# Altium PCB NEW_PCB_2021-12-28.pcbdoc
Units mm, origin at the board's own origin, x right, y up, seen from the top; angles counter-clockwise.
Board outline 29.65 x 29.79 mm, 2 copper layers (Top Layer, Bottom Layer); 1 components, 0 nets, 6 pads, 0 vias.
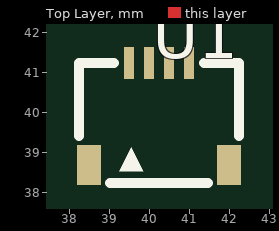
[diagram p0: Top Layer view]
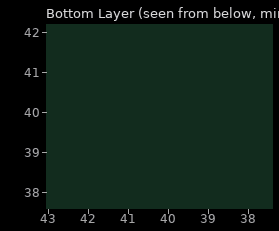
[diagram p1: Bottom Layer view, seen from below]

## Layer stack, top to bottom
Top Layer: signal copper (thickness not stored)
Dielectric: dielectric 0.32, FR-4, Dk 4.8
Bottom Layer: signal copper (thickness not stored)

## Board outline
55.054,25.4 25.4,25.4 25.4,55.191 55.054,55.191

## Components (designator, comment, footprint, x,y, rotation, side; value= is the part's Value field where it differs from the comment)
U1 "FFC-SMD_4P-P0.50_AFC42-S04FMA-1H" FFC-SMD_4P-P0.50_AFC42-S04FMA-1H 40.227,39.952 r0 top

## Footprints (in the part's own frame and the unit in brackets; to place one, negate y for a bottom-side part, rotate by r counter-clockwise, add the part's x,y. Pads: shape width x height; smd on the part's side, far side on the other; paste and mask are expansions set on the pad)
FFC-SMD_4P-P0.50_AFC42-S04FMA-1H [mm]
  rect 0.25x0.8 smd: 1(-0.75,1.275) 2(-0.25,1.275) 3(0.25,1.275) 4(0.75,1.275)
  rect 0.6x1 smd: 5(1.75,-1.275) 6(-1.75,-1.275)
  silkscreen extent -2,-1.72 2,1.28

## Nets (pads, with @x,y where several pads share a name; then routed paths per layer and width w, separated by ;. In a path a pad name is that pad's centre, name@x,y a point inside that pad or via, vN(x,y) a via of type N, cw(c..) or ccw(c..) an arc to the next point about the centre after c; other vN are vias at no path point)
pads on no net: U1.1 U1.2 U1.3 U1.4 U1.5 U1.6

## Silkscreen, mask and mechanical layers (free items; w line width, h text height)
Document:
  lines w0.003: 40.202,40.27 40.252,40.321